# Altium PCB BMS_Carrier_Board.PcbDoc (part 2 of 3)
Units mm, origin at the board's own origin, x right, y up, seen from the top; angles counter-clockwise.
Board outline 80 x 70 mm, 2 copper layers (Top Layer, Bottom Layer); 98 components, 80 nets, 377 pads, 123 vias.
Unrouted connection lines stored in the file: 52.
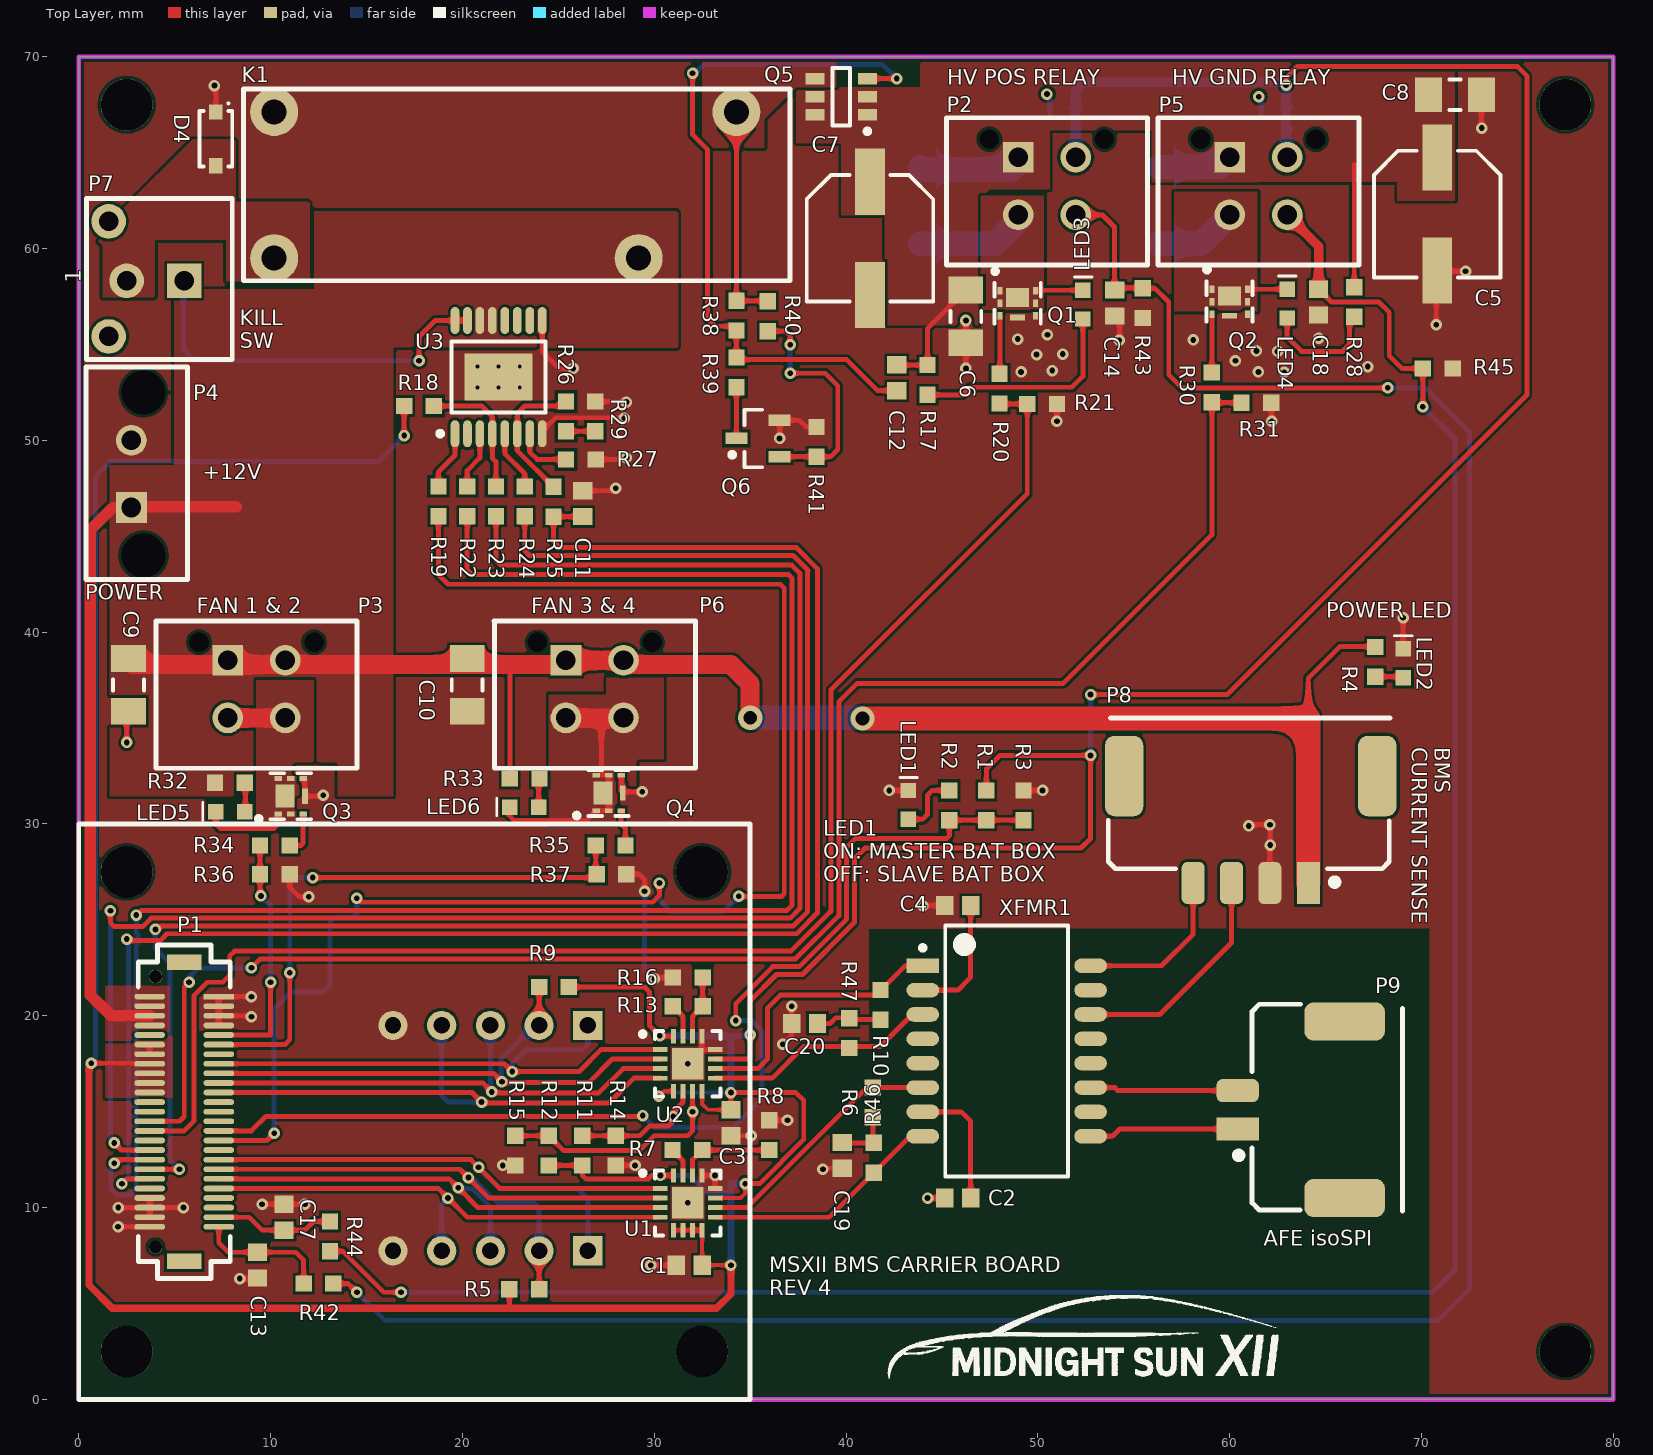
[diagram p0: Top Layer view]

## Part data (continued)
R39 R42 R44: library part "RES 1K OHM 5% 1/10W 0603", "1k Ohm ±5% 0.1W, 1/10W Chip Resistor 0603 (1608 Metric)", Manufacturer=Yageo, Manufacturer Part Number=RC0603JR-071KL, Operating Temperature="-55°C ~ 155°C", Package / Case="0603 (1608 Metric)", Power (Watts)="0.1W, 1/10W", Resistance (Ohms)=1k, Supplier Device Package=0603, Supplier Part Number 1=311-1.0KGRCT-ND, Temperature Coefficient=±100ppm/°C, Tolerance=±5%, Category=Resistors, ComponentLink1Description=http://www.yageo.com/documents/recent/PYu-RC_Group_51_RoHS_L_7.pdf, ComponentLink1URL=http://www.yageo.com/documents/recent/PYu-RC_Group_51_RoHS_L_7.pdf, Composition="Thick Film", Failure Rate=-, Features="Moisture Resistant", Height - Seated (Max)="0.022\" (0.55mm)", Packaging="Cut Tape (CT)", Part Status=Active, Pricing 1="1=0.15, 10=0.017, 100=0.0071, 1000=0.0032, 2500=0.00278 (CAD)", RoHS="RoHS Compliant", Size / Dimension="0.063\" L x 0.031\" W (1.60mm x 0.80mm)", Stock 1=4415240, Supplier 1=Digi-Key
U1 U2: "IC COMM INTERFACE ISOSPI 16-QFN", Manufacturer="Linear Technology", Manufacturer Part Number=LTC6820IUD#PBF, Package / Case="16-WFQFN Exposed Pad", Supplier Device Package="16-QFN (3x3)", Supplier Part Number 1=LTC6820IUD#PBF-ND, Voltage - Supply="2.7 V ~ 5.5 V", Applications="Isolated Communications Interface", Category="Integrated Circuits (ICs)", ComponentLink1Description=http://www.linear.com/docs/42317, ComponentLink1URL=http://www.linear.com/docs/42317, Interface=SPI, Mounting Type="Surface Mount", Packaging=Tube, Part Status=Active, Pricing 1="1=7.35, 25=4.8816, 100=4.0066 (CAD)", RoHS="RoHS Compliant", Stock 1=827, Supplier 1=Digi-Key
U3: library part "IC HSD Dual-Channel 40V 1KOhm", "IC HSD Dual-Channel 40V 1KOhm", Manufacturer Part Number=TPS2H000BQPWPRQ1-ND, ComponentLink1Description=Datasheet, ComponentLink1URL=http://www.ti.com/lit/ds/symlink/tps2h000-q1.pdf, Supplier 1=Digi-Key, Supplier Part Number=296-45179-1-ND, Supplier Part Number 1=TPS2H000BQPWPRQ1-ND
XFMR1: "PULSE XFMR 1CT:1CT 350UH SMD", Inductance=350uH, Isolation Voltage=1.5kVrms, Manufacturer="Bourns Inc.", Supplier Part Number 1=PT61018AAPEL-SCT-ND, MFG_PN=PT61018AAPEL-S, Supplier=Digikey, Supplier 1=Digi-Key, Supplier_PN=PT61018AAPEL-SCT-ND

## Free pads (board coordinates)
  round 2.7 hole 2.7: ""(2.5,2.5) ""(2.5,27.5) ""(2.5,67.5) ""(32.5,2.5) ""(32.5,27.5) ""(77.5,2.5) ""(77.5,67.5)

## Via types
v1: diameter 0.6, hole 0.3, Top Layer to Bottom Layer, tented both sides, 115 vias
v2: diameter 0.5, hole 0.2, Top Layer to Bottom Layer, tented both sides, 6 vias
v3: diameter 1.27, hole 0.711, Top Layer to Bottom Layer, tented both sides, 2 vias